# Altium PCB main_old.PcbDoc (part 11 of 15)
Units mil, origin at the board's own origin, x right, y up, seen from the top; angles counter-clockwise.
Board outline 8394.55 x 5164.44 mil, 7 copper layers (Top Layer 1, Layer 2, Layer 3, Unused, Layer 4_pow, Layer 5_gnd, Bottom 6+gnd), stack 46.112 mil thick; 363 components, 409 nets, 1750 pads, 991 vias.
Unrouted connection lines stored in the file: 1.
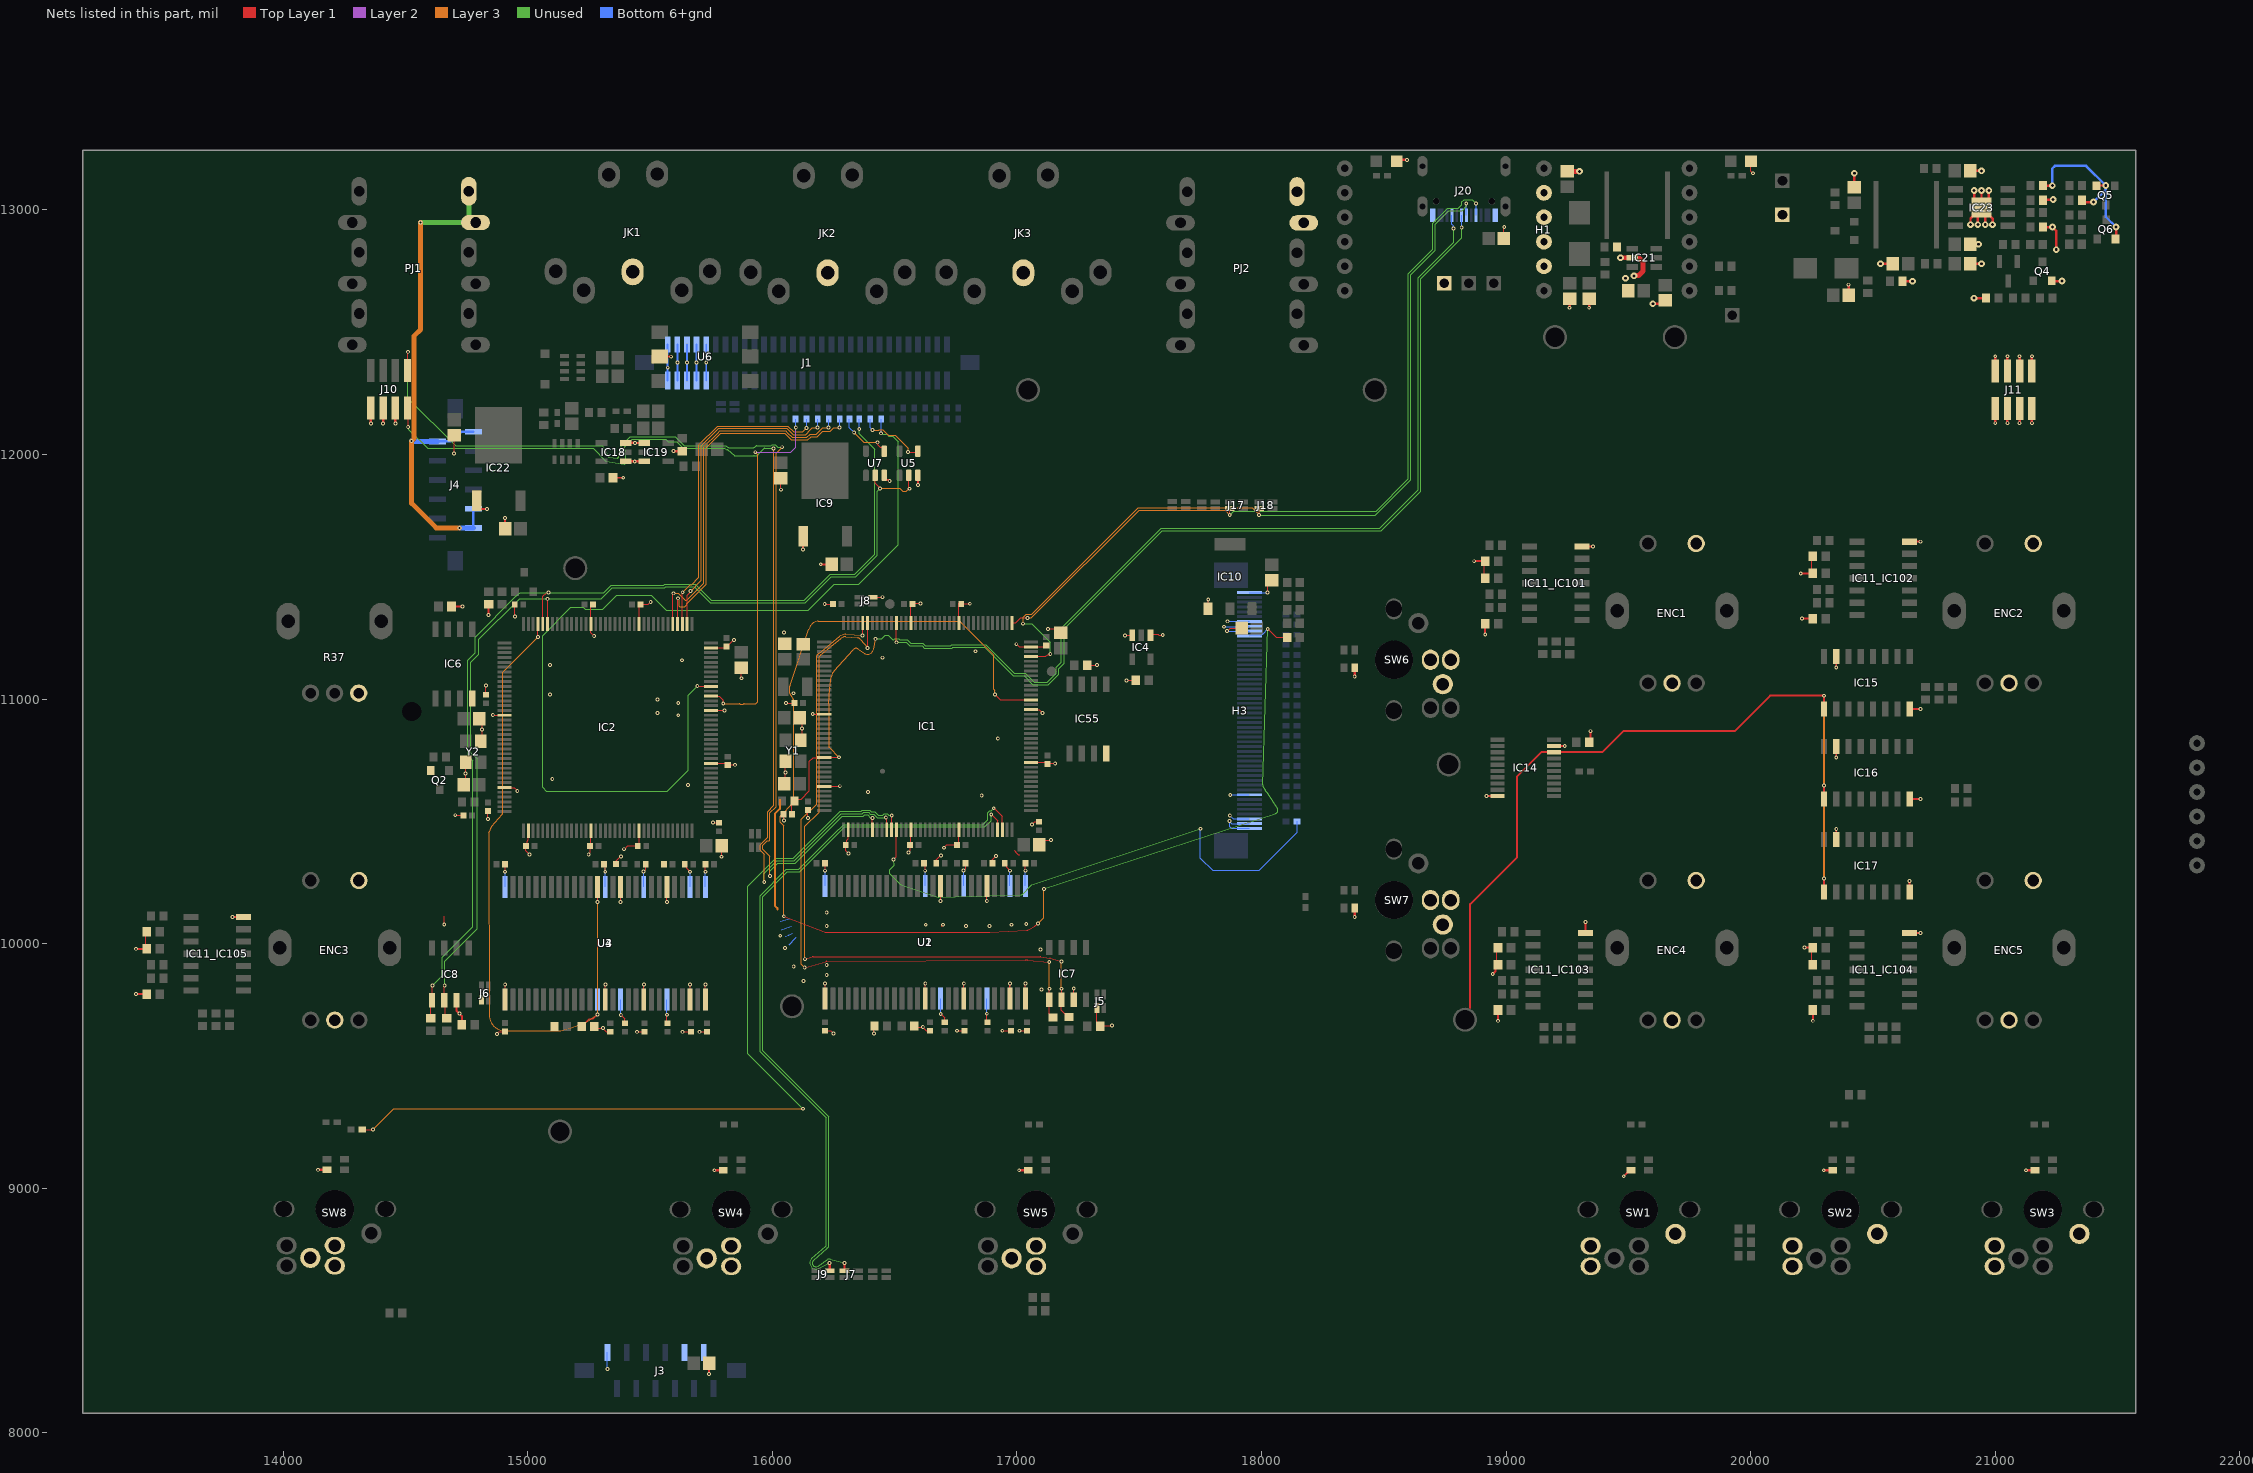
[diagram p14: the nets of this part, all layers, seen from the top]

## Via types
v1: diameter 15.75, hole 7.87, Top Layer 1 to Bottom 6+gnd, tented both sides, 923 vias
v2: diameter 27.56, hole 11.81, Top Layer 1 to Bottom 6+gnd, 45 vias
v3: diameter 23.62/23.62/23.62/23.62/23.62/23.62/23.62 (per signal layer), hole 12, Top Layer 1 to Bottom 6+gnd, tented top, 10 vias
v4: diameter 15.75, hole 7.87, Top Layer 1 to Bottom 6+gnd, 10 vias
v5: diameter 23.62/23.62/23.62/23.62/23.62/23.62/23.62 (per signal layer), hole 12, Top Layer 1 to Bottom 6+gnd, tented bottom, 3 vias

## Nets (pads, with @x,y where several pads share a name; then routed paths per layer and width w, separated by ;. In a path a pad name is that pad's centre, name@x,y a point inside that pad or via, vN(x,y) a via of type N, cw(c..) or ccw(c..) an arc to the next point about the centre after c; other vN are vias at no path point) (continued)
GND: C1.2 C2.2 C3.1 C4.1 C5.1 C6.1 C7.1 C8.1 C9.1 C10.1 C11.2 C12.2 C13.2 C14.2 C15.2 C16.2 C17.2 C18.2 C19.2 C20.2 C21.2 C22.2 C23.2 C24.2 C25.2 C26.2 C27.2 C28.2 C29.2 C30.2 C31.2 C32.2 C33.2 C34.2 C35.2 C36.2 C37.2 C38.2 C39.2 C40.2 C41.2 C42.2 C43.2 C44.2 C45.2 C46.2 C47.2 C48.2 C49.2 C50.2 C51.2 C52.2 C53.2 C54.2 C55.2 C56.2 C57.2 C58.2 C59.2 C60.2 C61.2 C63.1 C64.1 C65.1 C67.1 C68.1 C69.1 C70.1 C71.1 C72.1 C73.1 C74.1 C75.1 C76.1 C77_IC101.2 C77_IC102.2 C77_IC103.2 C77_IC104.2 C77_IC105.2 C78_IC101.2 C78_IC102.2 C78_IC103.2 C78_IC104.2 C78_IC105.2 C79_IC101.2 C79_IC102.2 C79_IC103.2 C79_IC104.2 C79_IC105.2 C80.2 C81.2 C85.1 C86.1 C87.1 C88.1 C89.1 C90.1 C91.1 C92.1 C93.1 C94.1 C95.1 C96.1 C97.1 D4.2 D5.2 ENC1.2 ENC1.C ENC2.2 ENC2.C ENC3.2 ENC3.C ENC4.2 ENC4.C ENC5.2 ENC5.C H1.2 H1.3 H1.4 H1.5 H3.1 H3.2 H3.3 H3.8 H3.42 H3.43 H3.44 H3.50 IC1.16 IC1.31 IC1.38 IC1.51 IC1.61 IC1.83 IC1.94 IC1.107 IC1.120 IC1.130 IC2.16 IC2.31 IC2.38 IC2.51 IC2.61 IC2.83 IC2.94 IC2.107 IC2.120 IC2.130 IC4.1 IC4.3 IC6.4 IC7.7 IC8.7 IC9.1 IC10.1 IC11_IC101.7 IC11_IC102.7 IC11_IC103.7 IC11_IC104.7 IC11_IC105.7 IC14.10 IC14.19 IC15.8 IC15.15 IC16.8 IC16.15 IC17.8 IC17.15 IC18.1 IC18.3 IC19.1 IC19.3 IC21.2 IC22.1 IC23.9 IC55.4 J1.51 J1.52 J1.53 J1.54 J1.55 J1.56 J1.57 J1.58 J1.59 J1.60 J3.1 J3.9 J3.11 J5.3 J6.3 J8.2 J10.4 J10.6 J10.8 J11.1 J11.2 J11.3 J11.4 J11.5 J11.6 J11.7 J11.8 J20.A1B12 J20.B1A12 JK1.2 JK2.2 JK3.2 PJ2.2 PJ2.22 Q2.2 Q4.2 Q5.2 Q6.2 R7.1 R9.1 R10.1 R12.1 R19.1 R20.1 R37.3 R51.1 R109.2 R126.2 R127.2 R128.1 R129.1 SW1.2 SW1.S1 SW2.2 SW2.S1 SW3.2 SW3.S1 SW4.2 SW4.S2 SW5.2 SW5.S2 SW6.2 SW6.S2 SW7.2 SW7.S2 SW8.2 SW8.S2 TP14.1 TP16.1 U1.6 U1.12 U1.28 U1.41 U1.46 U1.52 U1.54 U2.6 U2.12 U2.28 U2.41 U2.46 U2.52 U2.54 U3.6 U3.12 U3.28 U3.41 U3.46 U3.52 U3.54 U4.6 U4.12 U4.28 U4.41 U4.46 U4.52 U4.54 U5.3 U6.5 U7.3 Y1.2 Y1.4 Y2.2 Y2.4 | length 14393
  Top Layer 1 w5: C77_IC105.2@13437.01,9978.82 C79_IC105.2@13437.01,10048.82 ; v1(14658.33,10078.26) 14658.33,10111.48 ; v1(14698.37,12004.72) 14698.37,12076.56 C87.1@14700,12078.19 ; v1(14703.33,10525.26) 14736.48,10525.26 C8.1@14737.11,10524.63 ; C6.1@14745.26,10649.63 v1(14745.26,10695.47) Y2.2@14745.26,10741.32 ; Y2.4@14808.26,10827.94 14813.26,10832.94 14812.96,10833.23 v1(14812.96,10876.28) ; v1@14813.26,10876.28 C4.1@14813.26,10919.63 ; C23.2@14828.33,11017.58 v1(14828.33,11055.26) ; v1(14836.76,10509.97) C22.2@14836.76,10542.14 ; v1(14856.85,10934.67) 14857.26,10934.26 14903.59,10934.26 IC2.16@14904,10933.84 ; v1(14873.33,9631.26) 14882.06,9639.98 C47.2@14906.7,9639.98 ; U3.28@14899.75,9789.27 U3.28@14907.25,9781.77 ; IC2.31@14904,10638.57 14904.16,10638.41 14945.27,10638.41 14956.95,10626.73 v1(14956.95,10624.81) ; C60.2@14906.7,10324.63 14907.01,10324.32 v1(14907.01,10294.12) ; v1@14907.25,9833.24 U3.28@14907.25,9781.77 ; C24.2@14946.6,11386.87 14947.01,11386.47 v1(14947.01,11338.03) ; IC2.38@15001.96,10461.87 15001.96,10424.83 14996.76,10419.63 14996.76,10404.27 C29.2@14992.11,10399.63 14992.11,10379.48 v1(15006.33,10365.26) ; R12.1@15108.19,9658.48 R12.1@15109.34,9659.63 ; v1@15248.85,10367.54 15254.44,10373.13 C30.2@15254.44,10396.24 ; C30.2@15254.44,10399.63 15257.86,10403.05 IC2.51@15257.86,10461.87 ; C25.2@15265.89,11386.87 15257.86,11378.84 IC2.130@15257.86,11307.38 15257.86,11271.73 v1(15271.33,11258.26) ; R9.1@15271.7,9659.63 15276.7,9654.63 v1(15306.7,9654.63) 15321.35,9639.98 C48.2@15336.7,9639.98 ; C59.2@15311.7,10324.63 15316.45,10319.87 v1(15316.45,10294.12) ; U3.41@15316.7,9771.4 v1@15316.7,9833.24 ; C58.2@15362.05,10324.63 15362.05,10339.73 15379.34,10357.01 v1(15380.43,10357.01) ; v1@15379.69,10170.19 U3.12@15379.69,10232.03 ; v1(15380.09,9708.66) 15396.7,9692.06 C49.2@15396.7,9674.63 ; v1(15393.33,10386.26) 15395.33,10386.26 15408.7,10399.63 C31.2@15449.44,10399.63 15454.71,10404.9 IC2.61@15454.71,10461.87 ; v1(15446.7,9639.63) 15476.35,9639.63 C50.2@15476.7,9639.98 ; IC2.120@15454.71,11307.38 15454.71,11380.69 C26.2@15460.89,11386.87 15491.95,11386.87 v1(15502.33,11397.26) ; v1(15473.52,10294.63) 15481.7,10302.81 C57.2@15481.7,10324.63 ; U3.46@15474.18,9771.4 v1@15474.18,9833.24 ; v1(15568.42,9709.31) 15568.42,9677.9 C51.2@15571.7,9674.63 ; v1@15568.67,10170.19 U3.6@15568.67,10232.03 ; v1(15631.7,9639.63) 15666.35,9639.63 C52.2@15666.7,9639.98 ; C55.2@15641.7,10324.63 15649.56,10316.77 15649.56,10307.47 v1(15662.91,10294.12) ; U3.52@15663.16,9771.4 v1@15663.16,9833.24 ; v1(15701.7,9639.63) 15731.74,9639.63 C53.2@15732.09,9639.98 ; v1(15725.9,10294.12) 15725.9,10323.83 C54.2@15726.7,10324.63 ; U3.54@15726.15,9771.4 U3.54@15726.15,9771.46 v1@15726.15,9833.24 ; IC2.83@15749.52,10736.99 C32.2@15809.75,10736.99 ; IC2.94@15749.52,10953.53 15749.65,10953.39 15804.2,10953.39 v1(15804.33,10953.26) ; IC2.107@15749.52,11209.43 15806.56,11209.43 C27.2@15811.76,11214.63 15812.55,11214.63 15839.18,11241.26 15842.33,11241.26 v1(15843.33,11242.26) ; v1(15757.13,10494.98) C28.2@15781.4,10494.98 ; v1(15792.51,10355.38) C10.1@15792.51,10398.88 ; C32.2@15817.74,10730.01 15819.1,10731.37 v1(15846.69,10731.37) ; v1(15873.33,11085.26) C2.2@15873.33,11128.76 ; v1(16035,11856.18) C71.1@16035,11903.19 ; C7.1@16045.35,10528.82 16047.68,10526.5 16047.05,10525.86 v1(16047.05,10504.19) ; C5.1@16053.5,10653.82 v1(16053.5,10699.66) Y1.2@16053.5,10745.51 ; v1(16055,10983.82) C12.2@16090.35,10983.82 ; Y1.4@16116.5,10832.13 16121.5,10837.13 v1(16121.5,10880.47) C3.1@16121.5,10923.82 ; v1@16122.09,9847.2 v1(16127.09,9847.2) ; v1(16145.22,10513.6) 16145.22,10546.55 C13.2@16145.45,10546.77 ; v1(16165,10938.82) 16165.79,10938.03 IC1.16@16212.24,10938.03 ; U1.28@16208.05,9793.46 U1.28@16215.55,9785.96 ; IC1.31@16212.24,10642.76 16212.78,10643.29 16275.11,10643.29 v1(16275.64,10643.82) ; v1(16213.87,11388.21) 16214.48,11388.82 C11.2@16247.68,11388.82 ; C33.2@16215,9644.17 16215.35,9643.82 16238.61,9643.82 v1(16249.87,9632.56) ; C40.2@16215,10328.82 16215.31,10328.51 v1(16215.31,10298.31) ; v1@16215.55,9837.43 U1.28@16215.55,9785.96 ; IC1.38@16310.2,10466.06 16310.2,10429.01 16305,10423.82 16305,10408.46 C21.2@16300.35,10403.82 16300.35,10378.94 v1(16311.22,10368.07) ; J8.2@16410,11416.38 16449.35,11416.38 v1(16449.58,11416.61) ; v1@16415,9628.82 v1(16415,9632.56) 16415,9661.18 R10.1@16417.64,9663.82 ; v1(16557.09,10372.2) 16557.09,10375.11 16562.68,10380.7 C20.2@16562.68,10403.82 16566.1,10407.24 IC1.51@16566.1,10466.06 ; IC1.130@16566.1,11311.57 16566.1,11395.27 C14.2@16569.65,11398.82 ; C14.2@16572.32,11388.82 16575.61,11392.1 16605.25,11392.1 v1(16606.12,11391.23) ; R7.1@16580,9663.82 16585,9658.82 v1(16615,9658.82) 16629.65,9644.17 C34.2@16645,9644.17 ; C41.2@16620,10328.82 16624.75,10324.06 v1(16624.75,10298.31) ; U1.41@16625,9775.59 v1@16625,9837.43 ; C46.2@16670.35,10328.82 16670.35,10343.92 16687.64,10361.2 v1(16688.73,10361.2) ; v1@16687.99,10174.38 U1.12@16687.99,10236.22 ; v1(16688.39,9712.85) 16705,9696.25 C35.2@16705,9678.82 ; v1@16692.09,10072.2 v1(16697.09,10077.2) ; v1(16702.09,10392.2) 16713.7,10403.82 C19.2@16755.25,10403.82 ; v1(16755,9643.82) 16784.65,9643.82 C36.2@16785,9644.17 ; C19.2@16757.68,10403.82 16762.95,10409.09 IC1.61@16762.95,10466.06 ; IC1.120@16762.95,11311.57 16762.95,11392.13 C15.2@16769.65,11398.82 ; C15.2@16772.32,11388.82 16773.42,11389.92 v1(16807.14,11389.92) ; v1(16781.82,10298.82) 16790,10307 C42.2@16790,10328.82 ; U1.46@16782.48,9775.59 v1@16782.48,9837.43 ; v1(16876.72,9713.5) 16876.72,9682.09 C37.2@16880,9678.82 ; v1(16876.72,10174.13) U1.6@16876.72,10235.97 ; v1@16876.97,10174.38 U1.6@16876.97,10236.22 ; v1@16877.21,10174.62 U1.6@16877.21,10236.46 ; v1@16877.46,10174.38 U1.6@16877.46,10271.22 ; C43.2@16899.65,10328.82 16899.65,10343.46 v1(16915,10358.82) ; v1(16940,9643.82) 16974.65,9643.82 C38.2@16975,9644.17 ; C44.2@16950,10328.82 16957.86,10320.96 16957.86,10311.66 v1(16971.21,10298.31) ; U1.52@16971.21,9775.4 v1@16971.21,9837.68 ; U1.52@16971.46,9775.59 v1@16971.46,9837.43 ; U1.52@16971.7,9775.83 v1(16971.7,9837.68) ; U1.52@16971.95,9740.59 v1@16971.95,9837.43 ; 16988.09,10382.2 16995.41,10374.88 16995.41,10373.15 17004.36,10364.2 17011.09,10364.2 ; v1(16997.38,11224.53) 16998.52,11224.53 17008.82,11214.22 17057.16,11214.22 IC1.107@17057.76,11213.62 17114.8,11213.62 C16.2@17120,11218.82 ; v1(17010,9643.82) 17040.04,9643.82 C39.2@17040.39,9644.17 ; v1(17034.2,10298.31) 17034.2,10328.02 C45.2@17035,10328.82 ; U1.54@17034.45,9775.59 v1@17034.45,9837.43 ; IC1.83@17057.76,10741.18 17117.99,10741.18 C17.2@17125,10734.17 17127.6,10736.78 v1(17156.4,10736.78) 17156.83,10737.2 v1@17157.09,10737.2 ; IC1.94@17057.76,10957.72 17059.09,10956.38 17091.36,10956.38 v1@17104.37,10943.37 ; v1(17061.71,10487.58) 17072.94,10498.82 17089.65,10498.82 C18.2@17090,10498.46 ; C9.1@17091.5,10403.82 17111.44,10423.76 v1(17138.52,10423.76) ; v1(17126.31,11287.1) 17163.21,11287.1 C1.2@17180,11270.31 C1.2@17188.15,11262.16 ; IC7.7@17232.09,9770.43 v1(17232.09,9817.2) ; C63.1@17279.95,11138.84 v1(17326.66,11138.84) ; J5.3@17327.09,9737.09 17327.09,9680.2 17345.08,9662.2 17348.08,9665.2 v1(17389.09,9665.2) ; v1(17441.21,11260.34) 17441.81,11260.94 IC4.3@17470.98,11260.94 ; v1(17448.16,11076.73) C61.2@17480.39,11076.73 ; IC4.1@17545.79,11260.94 17549.23,11264.39 17578.14,11264.39 17580.64,11261.89 17595.64,11261.89 v1(17596.01,11261.52) ; IC10.1@17782.11,11360.08 v1(17782.11,11407.09) ; v1(17859.5,11277.91) 17871.16,11289.57 17900.31,11289.57 C76.1@17913.35,11302.6 ; v1(18024.8,11436.25) 18024.8,11469.09 C74.1@18041.42,11485.71 ; C77_IC101.2@18909.72,11493.82 C79_IC101.2@18909.72,11563.82 ; C77_IC103.2@18962.01,9913.82 C79_IC103.2@18962.01,9983.82 ; C88.1@18991.1,12883.31 18990.73,12883.68 18990.73,12928.69 v1(18992.61,12930.57) ; D4.2@20001.34,13200 20001.34,13158.66 v1(20010,13150) ; C77_IC104.2@20249.29,9913.82 C79_IC104.2@20249.29,9983.82 ; C77_IC102.2@20249.29,11513.82 C79_IC102.2@20249.29,11583.82 ; U3.28@14907.25,9781.77 14907.25,9771.4 U3.28@14907.25,9771.46 U3.28@14907.25,9781.77 ; U1.28@16215.55,9785.96 U1.28@16215.55,9775.59 U1.28@16215.55,9785.96
  Top Layer 1 w8: v1@13397.76,9793.82 C78_IC105.2@13441.93,9793.82 ; v1@13397.76,9978.82 C77_IC105.2@13441.93,9978.82 ; v1@13793.11,10108.82 IC11_IC105.7@13837.28,10108.82 ; C86.1@14688.07,11378.82 v1@14732.24,11378.82 ; IC8.7@14708.33,9768.49 14708.33,9725.48 v1(14720,9713.82) 14730,9703.82 C64.1@14730,9668.82 ; IC22.1@14790,11794.64 14790,11793.43 14806.16,11777.27 14832.36,11777.27 v1(14832.51,11777.42) ; v1@14840,11343.47 R109.2@14840,11387.64 ; C75.1@14907.01,11696.18 v1@14907.01,11740.35 ; C80.2@15348.15,11905 v1(15390,11905) ; U6.5@15539.96,12400 v1(15586.22,12400) ; v1@15741.5,8240.83 C85.1@15741.5,8285 ; v1@16125,11612.01 IC9.1@16125,11656.18 ; v1@16197.84,11551.18 C72.1@16242.01,11551.18 ; U7.3@16457.4,11915 16457.4,11903.77 16464.88,11896.3 16473.63,11896.3 16477.53,11892.4 v1(16479.63,11892.4) v1@16480,11892.03 ; v1(16594.8,11875.2) U5.3@16594.8,11915 ; v1(18869.65,11563.82) C79_IC101.2@18914.65,11563.82 ; v1(18914.65,11263.82) C78_IC101.2@18914.65,11308.82 ; v1(18920,10603.82) 18920.16,10603.66 IC14.10@18964.33,10603.66 ; v1(18945.5,9875.67) 18956.65,9886.82 18956.65,9903.54 C77_IC103.2@18966.93,9913.82 ; v1@18966.93,9684.65 C78_IC103.2@18966.93,9728.82 ; IC14.19@19195.67,10808.38 19195.89,10808.6 19239.78,10808.6 v1(19240,10808.82) ; IC11_IC101.7@19310,11623.82 v1(19355,11623.82) ; IC11_IC103.7@19325,10043.82 v1@19325,10087.99 ; C73.1@19345,10823.82 v1(19345,10868.82) ; v1@20205.12,11513.82 C77_IC102.2@20249.29,11513.82 ; v1@20210.04,11328.82 C78_IC102.2@20254.21,11328.82 ; v1@20220.83,9983.82 C79_IC104.2@20265,9983.82 ; v1@20254.21,9684.65 C78_IC104.2@20254.21,9728.82 ; IC17.15@20350,10423.82 v1@20350,10467.99 ; v1@20350,10761.93 IC16.15@20350,10806.1 ; v1@20350,11129.65 IC15.15@20350,11173.82 ; IC11_IC104.7@20649.57,10043.82 v1@20693.74,10043.82 ; IC11_IC102.7@20649.57,11643.82 v1@20693.74,11643.82 ; IC17.8@20650,10211.53 v1@20650,10255.71 ; IC16.8@20650,10591.53 v1@20694.17,10591.53 ; IC15.8@20650,10959.25 v1@20694.17,10959.25
  Top Layer 1 w10: v1(14141.66,9075.38) SW8.2@14178.54,9075.38 ; v1(14358.32,12126.42) J10.8@14358.32,12190.6 ; v1(14408.32,12126.42) J10.6@14408.32,12190.6 ; v1(14458.32,12126.42) J10.4@14458.32,12190.6 ; IC18.1@15399.63,11972.31 15400.27,11971.67 v1(15437.29,11971.67) 15437.93,11972.31 IC19.3@15476.2,11972.31 ; IC18.3@15399.63,12047.11 15399.84,12047.32 v1(15438.73,12047.32) 15438.93,12047.11 IC19.1@15476.2,12047.11 ; v1(15595.04,12014.29) 15595.17,12014.16 C81.2@15641.2,12014.16 ; v1(15762.42,9073.5) SW4.2@15799.29,9073.5 ; v1(17009.1,9073.5) SW5.2@17045.97,9073.5 ; v1(18380.96,10109.26) SW7.2@18380.96,10146.13 ; v1(18380.96,11091.85) SW6.2@18380.96,11128.72 ; D5.2@18552.68,13200 18557.68,13205 v1(18595,13205) ; v1(19259.81,12600.13) C89.1@19259.81,12637 ; v1(19339.81,12600.13) C91.1@19339.81,12637 ; v1(19481.11,9048.93) SW1.2@19507.18,9075 ; v2(19600.08,12616.31) 19600.88,12617.12 19637.12,12617.12 C69.1@19650,12630 ; v1(20298.76,9073.5) SW2.2@20335.64,9073.5 ; C92.1@20400.51,12650 C92.1@20400.86,12649.65 ; C92.1@20400.51,12650.98 v1(20400.51,12694.49) ; C97.1@20424.02,13092.99 v2(20424.02,13150) ; v2(20530.91,12780) C95.1@20581.02,12780 ; R19.1@20620.2,12710 R19.1@20621.47,12708.73 v2(20661.71,12708.73) ; C94.1@20897.01,12780 v2(20944.02,12780) ; C93.1@20897.01,12860 v2(20931.46,12860) ; C96.1@20897.01,13160 v2(20944.02,13160) ; v2(20899.02,12940) 20899.02,12965 IC23.9@20929.02,12995 ; v2(20913.39,12639.37) R51.1@20962.2,12639.37 ; v2(20914.02,13080) 20914.02,13040 IC23.9@20944.02,13010 ; v2(20929.02,12940) IC23.9@20929.02,12995 ; v2(20944.02,13080) IC23.9@20944.02,13010 ; v2(20959.02,12940) 20959.02,12980 20966.52,12987.5 20989.02,12965 v2(20989.02,12940) ; v2(20974.02,13080) 20974.02,13040 IC23.9@20944.02,13010 ; v1(21000,12128.13) J11.8@21000,12165 ; J11.7@21000,12365 v1(21000,12401.87) ; v1(21050,12128.13) J11.6@21050,12165 ; J11.5@21050,12365 v1(21050,12401.87) ; v1(21100,12128.13) J11.4@21100,12165 ; J11.3@21100,12365 v1(21100,12401.87) ; v1(21125.53,9073.5) SW3.2@21162.41,9073.5 ; v1(21150,12128.13) J11.2@21150,12165 ; J11.1@21150,12365 v1(21150,12401.87) ; R126.2@21195.2,12930 v2(21234.02,12930) 21249.58,12914.44 v2(21249.58,12837.57) ; R128.1@21195.2,13100 21195.88,13099.31 v2(21233.43,13099.31) ; R127.2@21198.09,13042.5 v2(21236.91,13042.5) ; Q4.2@21230.79,12710 21231.42,12709.37 v2(21273.39,12709.37) ; R129.1@21355.2,13040 21363.01,13032.19 v2(21401.83,13032.19) ; Q5.2@21416.61,13098.74 21417.87,13100 v2(21451.89,13100) ; Q6.2@21491.42,12881.26 21494.02,12883.86 v2(21494.02,12930) ; IC23.9@20929.02,12995 IC23.9@20944.02,13010
  Top Layer 1 w20: C70.1@19249.81,13157.99 v2(19299.81,13157.99) ; v2(19467.8,12804.4) 19543.5,12804.4 19560.01,12787.89 19560.01,12749.74 19542.4,12732.13 19524.79,12732.13 v2(19523.34,12730.68)
  Layer 3 w8: 16020,10138.82 16020,10145.75 16010.17,10155.58 16010.17,10530.7 16030.55,10551.08 16030.55,10588.82
  Bottom 6+gnd w5: U4.28@14907.25,10232.03 v1@14907.25,10293.87 ; v1(15316.45,10294.12) 15316.45,10308.38 15318.33,10310.26 ; U4.41@15316.7,10232.03 v1@15316.7,10293.87 ; v1(15325.53,8260.95) 15325.53,8276.49 15325.65,8276.61 J3.1@15325.65,8328.46 ; U4.12@15379.69,9771.4 15380.09,9771 v1(15380.09,9708.66) ; v1(15473.52,10294.63) 15473.52,10232.69 U4.46@15474.18,10232.03 ; v1@15568.67,9709.56 U4.6@15568.67,9771.4 ; U4.52@15663.16,10232.03 U4.52@15663.16,10232.09 v1@15663.16,10293.87 ; U4.54@15726.15,10232.03 U4.54@15726.15,10232.09 v1@15726.15,10293.87 ; 16031.42,10091.84 16069.12,10101.06 ; 16037.09,10057.2 16077.09,10072.2 ; 16052.48,10029.28 16067.54,10035.41 ccw(c16061.74,10049.65) 16068.27,10035.73 16082.09,10042.2 ; 16069.72,9996.4 16080.34,10007.41 cw(c16091.41,9996.73) 16080.53,10007.61 16081.11,10008.18 ; 16097.09,10027.2 16082.04,10009.19 ; U2.28@16215.55,10236.22 v1@16215.55,10298.06 ; U2.41@16625,10236.22 v1@16625,10298.06 ; U2.12@16687.99,9775.59 16688.39,9775.19 v1(16688.39,9712.85) ; v1(16781.82,10298.82) 16781.82,10236.88 U2.46@16782.48,10236.22 ; v1@16876.97,9713.75 U2.6@16876.97,9775.59 ; U2.52@16971.46,10236.22 v1@16971.46,10298.06 ; U2.54@17034.45,10236.22 v1@17034.45,10298.06 ; v1(17846.42,11295.71) 17847.48,11296.77 17948.94,11296.77 H3.43@17950,11297.83 ; v1@17859.27,11277.67 17859.74,11278.15 H3.42@17950,11278.15 ; v1(17861.12,11318.02) 17861.37,11317.77 17949.75,11317.77 H3.44@17950,11317.52 ; v1(17868.92,10501.81) 17868.92,10499.9 v1@17870,10498.82 ; v1(17870.37,10523.98) 17883.91,10510.43 H3.3@17950,10510.43 H3.3@17950.78,10511.21 ; v1(17872.11,10608.09) 17872.5,10608.47 17949.62,10608.47 H3.8@17950,10608.86 ; H3.1@17950,10471.06 17877.75,10471.06 17870,10478.82 v1@17870,10498.82 ; H3.50@17950,11435.63 v1@18024.18,11435.63 ; H3.2@17950.62,10491.37 H3.2@17950,10490.75 17878.07,10490.75 v1@17870,10498.82 ; 16081.11,10008.18 ccw(c16070.24,10019.05) 16082.04,10009.19 ; 16081.11,10008.18 ccw(c16070.24,10019.05) 16082.04,10009.19 ; 16081.11,10008.18 ccw(c16070.24,10019.05) 16082.04,10009.19 ; 16081.11,10008.18 ccw(c16070.24,10019.05) 16082.04,10009.19 ; 16081.11,10008.18 ccw(c16070.24,10019.05) 16082.04,10009.19 ; 16081.11,10008.18 ccw(c16070.24,10019.05) 16082.04,10009.19 ; 16081.11,10008.18 ccw(c16070.24,10019.05) 16082.04,10009.19 ; 16081.11,10008.18 ccw(c16070.24,10019.05) 16082.04,10009.19 ; 16081.11,10008.18 ccw(c16070.24,10019.05) 16082.04,10009.19 ; 16081.11,10008.18 ccw(c16070.24,10019.05) 16082.04,10009.19 ; 16081.11,10008.18 ccw(c16070.24,10019.05) 16082.04,10009.19 ; 16081.11,10008.18 ccw(c16070.24,10019.05) 16082.04,10009.19 ; 16081.11,10008.18 ccw(c16070.24,10019.05) 16082.04,10009.19 ; 16081.11,10008.18 ccw(c16070.24,10019.05) 16082.04,10009.19 ; 16081.11,10008.18 ccw(c16070.24,10019.05) 16082.04,10009.19 ; 16081.11,10008.18 ccw(c16070.24,10019.05) 16082.04,10009.19
  Bottom 6+gnd w8: J1.59@15571.97,12302.36 v1(15571.97,12355) 15571.97,12390.39 15569.35,12393.01 15569.35,12406.99 15571.97,12409.61 J1.60@15571.97,12450 ; J1.57@15611.34,12302.36 v1(15611.34,12376.18) J1.58@15611.34,12450 ; J1.55@15650.71,12302.36 v1(15650.71,12376.18) J1.56@15650.71,12450 ; J1.53@15690.08,12302.36 v1(15690.08,12376.18) J1.54@15690.08,12450 ; J1.51@15729.45,12302.36 v1(15729.45,12376.18) J1.52@15729.45,12450
  Bottom 6+gnd w10: v2(21233.43,13099.31) 21233.43,13169.42 21244.02,13180 21371.89,13180 v2(21451.89,13100) ; v2(21401.83,13032.19) 21450.86,13081.22 21450.86,13098.97 v2(21451.89,13100) ; v2(21494.02,12930) 21451.89,12972.13 v2(21451.89,13100)
  other v1: 15741.34,8240.67 18966.77,9684.49 20254.06,9684.49 13397.6,9793.98 17100.37,9812.2 14907.5,9833.49 15316.94,9833.49 15474.42,9833.49 15663.4,9833.49 15726.39,9833.49 16215.8,9837.68 16625.24,9837.68 16782.72,9837.68 17034.69,9837.68 16222.09,9872.2 16087.09,9907.2 16222.09,9912.2 17096.67,9976.53 13397.6,9978.98 16052.09,9982.2 20220.67,9983.98 16032.09,10032.2 20693.9,10043.66 16222.09,10072.2 16792.09,10072.2 16887.09,10072.2 16627.09,10077.2 16977.09,10077.2 17038.01,10080.26 19325.16,10088.15 13792.95,10108.98 16222.09,10127.2 15379.45,10169.94 15568.42,10169.94 16687.75,10174.13 20650.16,10255.86 15248.85,10364.63 20350.16,10468.15 20694.33,10591.38 16855.84,10605.43 16391.31,10620.38 15655,10648.82 15100,10673.82 20349.84,10761.77 16921.66,10838.82 15615,10933.82 17104.37,10943.24 15530,10943.82 20694.33,10959.09 15615,10983.82 15530,10998.82 15090,11018.82 16086.71,11023.77 20349.84,11129.49 15090,11138.82 15630,11158.82 16449.56,11169.26 16830,11195.74 16047.09,11272.2 20209.88,11328.98 14839.84,11343.31 14732.4,11378.66 20204.96,11513.98 16197.68,11551.34 16124.84,11611.85 20693.9,11643.66 14907.17,11740.51
  other v2: 19488.62,12720.72
GND_A: J4.2 J4.4 J4.11 J4.12 PJ1.2 PJ1.22 | length 2139.1
  Unused w20: v1(14561.41,12948.59) PJ1.22@14786.24,12948.59 ; PJ1.22@14758.68,12968.45 PJ1.2@14758.68,13076.5
  Layer 3 w20: v1(14561.41,12948.59) 14561.41,12511.41 14535,12485 14535,12065 v1(14525,12055) 14525,11800 14625,11700 v1(14720,11700)
  Bottom 6+gnd w10: J4.11@14630,12053.7 14688.7,12053.7 14728.07,12093.07 J4.12@14777.64,12093.07 ; J4.2@14777.64,11699.37 J4.4@14777.64,11778.11
  Bottom 6+gnd w20: v1(14525,12055) 14526.3,12053.7 J4.11@14630,12053.7 ; v1(14720,11700) 14777.01,11700 J4.2@14777.64,11699.37
GPIO_GUI.LED1_1: IC1.43 J10.1 | length 4374.9
  Top Layer 1 w5: J10.1@14508.32,12344.14 14510,12345.82 v1(14510,12420) ; IC1.43@16408.62,10466.06 v1(16408.64,10513.73)
  Unused w5: v1(14510,12420) 14510,12230 14705,12035 15305,12035 15328.77,11992.22 ; 15328.78,11992.19 ccw(c15333.14,11994.65) 15332.5,11989.69 15365.55,11985.56 ; 15365.58,11985.55 ccw(c15366.17,11990.52) 15371.04,11989.36 15381.58,12033.62 15381.91,12035 15382.91,12036 15419.6,12072.69 15602.41,12072.69 15640.1,12035 15809.63,12035 15816.54,12030.72 cw(c15813.89,12026.48) 15817.05,12030.35 ccw(c15825,12040) 15825,12027.5 15920.28,12027.5 ccw(c15920.28,12040) 15929.14,12031.19 15931.51,12033.55 cw(c15935.03,12030) 15935.03,12035 15993.26,12035 15998.63,12040.37 16011.37,12040.37 16021.74,12030 v1(16040,12030) ; v1(15989.9,10275.98) 15989.9,10297.04 16021.86,10329 16093.87,10329 16285.82,10520.94 16371.31,10520.94 16376.68,10526.31 16389.42,10526.31 16399.94,10515.79 16406.59,10515.79 v1(16408.64,10513.73)
  Layer 3 w5: v1(15989.9,10275.98) 15989.9,10356.61 15960.69,10385.82 15960.69,10401.55 15979.14,10420 15987.07,10420 15990,10422.93 15990,10535.04 16015,10560.04 16015,12005 v1(16040,12030)
GPIO_GUI.LED2_1: IC1.46 J10.2 | length 4258.9
  Top Layer 1 w5: J10.2@14508.32,12190.6 14510.75,12188.17 v1(14510.75,12112.06) ; v1(16463.77,10515.28) 16463.77,10514.31 16467.68,10510.4 IC1.46@16467.68,10466.06
  Unused w5: v1(14510.75,12112.06) 14512.72,12110.09 14512.72,12102.28 14590,12025 15267.74,12025 15317.75,11973.51 ccw(c15321.33,11977) 15320.56,11972.06 15393.75,11960.95 ; 15393.78,11960.94 ccw(c15394.5,11965.89) 15399.48,11966.3 15394.28,12029.66 15427.31,12062.69 15563.21,12062.69 15573.21,12052.69 15608.27,12052.69 15635.96,12025 15805.36,12025 ; 15805.39,12025 cw(c15805.33,12020) 15808.06,12024.19 15812.71,12021.16 ccw(c15825,12040) 15815.47,12019.62 15815.98,12019.38 cw(c15813.87,12014.85) 15817.05,12018.71 ; 15817.09,12018.67 15843.6,11996.19 ; 15843.62,11996.17 ccw(c15846.83,12000) 15846.83,11995 15924.56,11995 cw(c15924.53,11990) 15925.85,11994.82 ccw(c15930,12009.63) 15941.87,11999.85 cw(c15945.7,11996.64) 15942.14,12000.15 15965.54,12023.55 cw(c15969.06,12020) 15969.06,12025 v1(16005,12025) ; v1(15966.82,10252.68) 15965.49,10254.02 15965.49,10286.77 16017.72,10339 16089.73,10339 16281.67,10530.94 16367.16,10530.94 16372.54,10536.31 16393.56,10536.31 16400.66,10529.21 16414.9,10529.21 16428.84,10515.28 v1(16463.77,10515.28)
  Layer 3 w5: v1(15966.82,10252.68) 15966.82,10365.55 15950.69,10381.68 15950.69,10389.31 15950,10390 15950,10405 15980,10435 15980,10540 16005,10565 v1(16005,12025)
GPIO_GUI.LED3_1: IC1.47 R3.2 | length 3630.3
  Top Layer 1 w5: R3.2@14322.64,9240 14366.77,9240 v1(14367.35,9240.58) ; IC1.47@16487.36,10466.06 16487.36,10523.36 v1(16488,10524)
  Unused w5: v1(16125,9325) 15900,9550 15900,10235.43 16013.57,10349 16085.59,10349 16277.53,10540.94 16363.02,10540.94 16368.4,10546.31 16397.7,10546.31 16404.8,10539.21 16419.04,10539.21 16432.98,10525.28 16452.03,10525.28 16457.41,10530.65 16470.14,10530.65 16476.53,10524.27 16487.73,10524.27 v1(16488,10524)
  Layer 3 w5: v1(14367.35,9240.58) 14452.35,9325.58 16124.42,9325.58 v1(16125,9325)
GUI_NRST: C7.2 IC1.25 J20.A5 R5.2 | length 5372.7
  Top Layer 1 w5: C7.2@16080,10528.82 16080,10573.23 R5.2@16090.59,10583.82 16096.92,10590.15 16117.06,10590.15 16151.63,10624.73 16151.63,10745.45 16167.05,10760.87 IC1.25@16212.24,10760.87 16212.91,10761.53 16271.42,10761.53 v1(16272.09,10762.2)
  Unused w5: v1(16421.86,11246.58) 16446.18,11246.58 16461.05,11261.44 16473.79,11261.44 16491.71,11243.52 16496.66,11243.52 16500.72,11247.58 16515.67,11247.58 16521.03,11242.22 16551.6,11242.22 16565,11228.82 16615.44,11228.82 16625.91,11218.34 16729.52,11218.34 16733.76,11222.58 16872.45,11222.58 16988.83,11106.2 17033.83,11106.2 17071.04,11069 17124.11,11069 17160.78,11105.66 17160.78,11130.45 17181.69,11151.37 17181.69,11289.98 17590.7,11698.99 18483.13,11698.99 18640.37,11856.23 18640.37,12723.51 18785.16,12868.3 v1(18785.16,12923.92)
  Layer 3 w5: v1(16272.09,10762.2) 16232.14,10802.15 ; v1(16421.86,11246.58) 16413.87,11204.34 cw(c16388.94,11209.06) 16374.59,11188.13 16350.85,11204.46 ; 16230.7,10805.66 ccw(c16235.7,10805.66) 16232.14,10802.15 ; 16230.7,10805.66 ccw(c16235.7,10805.66) 16232.14,10802.15 ; 16230.7,10805.66 ccw(c16235.7,10805.66) 16232.14,10802.15 ; 16230.7,10805.66 ccw(c16235.7,10805.66) 16232.14,10802.15 ; 16230.7,10805.66 ccw(c16235.7,10805.66) 16232.14,10802.15 ; 16230.7,10805.66 ccw(c16235.7,10805.66) 16232.14,10802.15 ; 16230.7,10805.66 ccw(c16235.7,10805.66) 16232.14,10802.15 ; 16230.7,10805.66 ccw(c16235.7,10805.66) 16232.14,10802.15 ; 16230.7,10805.66 ccw(c16235.7,10805.66) 16232.14,10802.15 ; 16230.7,10805.66 ccw(c16235.7,10805.66) 16232.14,10802.15 ; 16230.7,10805.66 ccw(c16235.7,10805.66) 16232.14,10802.15 ; 16230.7,10805.66 ccw(c16235.7,10805.66) 16232.14,10802.15 ; 16230.7,10805.66 ccw(c16235.7,10805.66) 16232.14,10802.15 ; 16230.7,10805.66 ccw(c16235.7,10805.66) 16232.14,10802.15 ; 16230.7,10805.66 ccw(c16235.7,10805.66) 16232.14,10802.15 ; 16230.7,10805.66 ccw(c16235.7,10805.66) 16232.14,10802.15 ; 16230.7,10805.66 16230.68,10978.64 cw(c16276.06,10978.64) 16230.79,10981.78 16234.95,11041.91 ; 16234.95,11041.91 cw(c16290.2,11038.08) 16235.24,11044.84 ; 16234.95,11041.91 cw(c16290.2,11038.08) 16235.24,11044.84 ; 16234.95,11041.91 cw(c16290.2,11038.08) 16235.24,11044.84 ; 16234.95,11041.91 cw(c16290.2,11038.08) 16235.24,11044.84 ; 16234.95,11041.91 cw(c16290.2,11038.08) 16235.24,11044.84 ; 16234.95,11041.91 cw(c16290.2,11038.08) 16235.24,11044.84 ; 16234.95,11041.91 cw(c16290.2,11038.08) 16235.24,11044.84 ; 16234.95,11041.91 cw(c16290.2,11038.08) 16235.24,11044.84 ; 16234.95,11041.91 cw(c16290.2,11038.08) 16235.24,11044.84 ; 16234.95,11041.91 cw(c16290.2,11038.08) 16235.24,11044.84 ; 16234.95,11041.91 cw(c16290.2,11038.08) 16235.24,11044.84 ; 16234.95,11041.91 cw(c16290.2,11038.08) 16235.24,11044.84 ; 16234.95,11041.91 cw(c16290.2,11038.08) 16235.24,11044.84 ; 16234.95,11041.91 cw(c16290.2,11038.08) 16235.24,11044.84 ; 16234.95,11041.91 cw(c16290.2,11038.08) 16235.24,11044.84 ; 16234.95,11041.91 cw(c16290.2,11038.08) 16235.24,11044.84 ; 16235.24,11044.84 16240.98,11091.28 cw(c16286.01,11085.73) 16252.47,11116.29 16330.72,11202.18 ; 16330.72,11202.18 cw(c16342.09,11191.83) 16350.85,11204.46 ; 16330.72,11202.18 cw(c16342.09,11191.83) 16350.85,11204.46 ; 16330.72,11202.18 cw(c16342.09,11191.83) 16350.85,11204.46 ; 16330.72,11202.18 cw(c16342.09,11191.83) 16350.85,11204.46 ; 16330.72,11202.18 cw(c16342.09,11191.83) 16350.85,11204.46 ; 16330.72,11202.18 cw(c16342.09,11191.83) 16350.85,11204.46 ; 16330.72,11202.18 cw(c16342.09,11191.83) 16350.85,11204.46 ; 16330.72,11202.18 cw(c16342.09,11191.83) 16350.85,11204.46 ; 16330.72,11202.18 cw(c16342.09,11191.83) 16350.85,11204.46 ; 16330.72,11202.18 cw(c16342.09,11191.83) 16350.85,11204.46 ; 16330.72,11202.18 cw(c16342.09,11191.83) 16350.85,11204.46 ; 16330.72,11202.18 cw(c16342.09,11191.83) 16350.85,11204.46 ; 16330.72,11202.18 cw(c16342.09,11191.83) 16350.85,11204.46 ; 16330.72,11202.18 cw(c16342.09,11191.83) 16350.85,11204.46 ; 16330.72,11202.18 cw(c16342.09,11191.83) 16350.85,11204.46 ; 16330.72,11202.18 cw(c16342.09,11191.83) 16350.85,11204.46
  Bottom 6+gnd w5: J20.A5@18778.6,12978.4 18778.6,12941.8 18783.11,12937.29 18783.11,12925.98 v1(18785.16,12923.92)
GUI_SWD.CLK_1: IC1.109 J17.1 J20.A8 | length 3270.8
  Top Layer 1 w5: IC1.109@16979.49,11311.57 16980.12,11312.2 16995.7,11312.2 17015.41,11331.91 v1(17043.65,11331.91) ; v1@17870,11752.72 J17.1@17870,11778.82
  Unused w5: v1(17870.12,11752.6) 17886.42,11768.9 18468.12,11768.9 18600.37,11901.14 18600.37,12740.08 18699.39,12839.1 18699.39,12944.74 18761.98,13007.33 18805.26,13007.33 18819.18,13021.25 18819.18,13033.26 18828.05,13042.13 18861.22,13042.13 v1(18876.59,13026.75)
  Layer 3 w5: v1(17043.65,11331.91) 17059.36,11331.91 17499.47,11772.02 17850.69,11772.02 v1(17870.12,11752.6)
  Bottom 6+gnd w5: J20.A8@18877.02,12978.4 v1@18877.02,13026.32
GUI_SWD.IO_1: IC1.105 J18.1 J20.A7 | length 3473.8
  Top Layer 1 w5: IC1.105@17057.76,11174.25 17057.87,11174.37 17118.45,11174.37 17126.16,11182.08 17134.35,11182.08 v1(17136.4,11184.13) ; v1@17990,11752.72 J18.1@17990,11778.82
  Unused w5: v1(17025.37,11308.31) 17060.98,11308.31 17136.4,11232.89 v1(17136.4,11184.13) ; v1(17990.12,11752.6) 18465.97,11752.6 18610.37,11897 18610.37,12735.94 18709.39,12834.96 18709.39,12940.6 18766.12,12997.33 18820.63,12997.33 18837.76,13014.47 18837.76,13026.21 v1(18837.22,13026.75)
  Layer 3 w5: v1(17025.37,11308.31) 17025.29,11308.39 17025.29,11335.29 17037.28,11347.28 17060.59,11347.28 17495.33,11782.02 17961.98,11782.02 17990.12,11753.89 v1(17990.12,11752.6)
  Bottom 6+gnd w5: J20.A7@18837.65,12978.4 v1@18837.65,13026.32
GUI_SWD.SWO_1: IC1.133 J20.A6 | length 3918.2
  Top Layer 1 w5: v1(16507.09,11232.2) IC1.133@16507.07,11311.55
  Unused w5: v1(16507.09,11232.2) 16547.47,11232.2 16562.16,11217.52 16612.59,11217.52 16621.77,11208.34 16734.52,11208.34 16737.3,11211.12 16867.7,11211.12 16984.08,11094.74 17029.08,11094.74 17064.82,11059 17128.25,11059 17170.78,11101.52 17170.78,11124.24 17193.16,11146.62 17193.16,11287.3 17594.84,11688.99 18489.34,11688.99 18650.37,11850.01 18650.37,12719.37 18818.4,12887.4 v1(18818.4,12928.05)
  Bottom 6+gnd w5: J20.A6@18817.97,12978.4 18818.18,12978.19 18818.18,12928.27 v1(18818.4,12928.05)
I2C1_SCL: IC2.139 IC8.6 R15.1 U5.2 U7.2 | length 4086.1
  Top Layer 1 w5: v1(14660,9828.82) 14658.33,9827.15 IC8.6@14658.33,9768.49 14662.09,9764.73 14662.09,9701.51 R15.1@14668.33,9695.26 ; IC2.139@15080.7,11307.38 v1(15080.7,11410.07) ; U7.2@16420,11915 16420,11881.64 v1(16440,11861.64) ; U5.2@16557.4,11915 16557.4,11865.51 16560,11862.91 v1(16560,11860)
  Unused w5: v1(14660,9828.82) 14660,9928.82 14792.68,10061.5 14792.68,10756.14 14767.5,10781.32 14767.5,11151.32 14800,11183.82 14800,11243.82 14966.25,11410.07 v1(15080.7,11410.07) 15300.07,11410.07 15345.86,11455.86 15560.01,11455.86 15563.78,11459.64 15680.36,11459.64 15746.18,11393.82 16134.68,11393.82 16240.86,11500 16340.86,11500 16428.36,11587.5 16428.36,11850 v1(16440,11861.64)
  Layer 3 w5: v1(16440,11861.64) 16521.62,11861.64 16533.63,11849.63 16546.37,11849.63 16556.74,11860 v1(16560,11860)
I2C1_SCL1_9: R149.1 U5.4 | length 284.3
  Top Layer 1 w5: v1(16555,12010) 16590.98,12010 U5.4@16594.8,12013.82
  Layer 3 w5: v1(16410,12100) 16435.58,12100 16437.76,12102.17 16450.49,12102.17 16461.71,12090.96 16461.71,12090.41 16472.92,12079.19 16502.27,12079.19 16555,12026.46 v1(16555,12010)
  Bottom 6+gnd w5: R149.1@16400,12144.72 16400,12110 v1(16410,12100)
I2C1_SCL2_9: R151.1 U7.4 | length 227.9
  Top Layer 1 w5: v1(16430,12050) 16431.48,12048.52 16431.48,12039.74 16441.22,12030 16448.54,12030 16457.4,12021.14 U7.4@16457.4,12013.82
  Layer 3 w5: v1(16334.4,12089.55) 16373.95,12050 v1(16430,12050)
  Bottom 6+gnd w5: R151.1@16315,12144.72 16315,12110 16334.4,12090.6 v1(16334.4,12089.55) v1@16335,12088.95
I2C1_SCL_6: IC1.139 IC7.6 R13.1 | length 3306
  Top Layer 1 w5: v1(16133.17,9936.49) 16163.94,9946.7 ; v1(16388.94,11209.05) IC1.139@16388.94,11311.57 ; v1(17182.09,9927.2) 17135.92,9939.52 ; v1(17182.13,9815.69) 17182.13,9770.48 IC7.6@17182.09,9770.43 17182.09,9727.64 17210.12,9699.61 R13.1@17212.09,9699.61 ; 16163.94,9946.7 cw(c16167.09,9937.2) 16167.09,9947.2 ; 16163.94,9946.7 cw(c16167.09,9937.2) 16167.09,9947.2 ; 16163.94,9946.7 cw(c16167.09,9937.2) 16167.09,9947.2 ; 16163.94,9946.7 cw(c16167.09,9937.2) 16167.09,9947.2 ; 16163.94,9946.7 cw(c16167.09,9937.2) 16167.09,9947.2 ; 16163.94,9946.7 cw(c16167.09,9937.2) 16167.09,9947.2 ; 16163.94,9946.7 cw(c16167.09,9937.2) 16167.09,9947.2 ; 16163.94,9946.7 cw(c16167.09,9937.2) 16167.09,9947.2 ; 16163.94,9946.7 cw(c16167.09,9937.2) 16167.09,9947.2 ; 16163.94,9946.7 cw(c16167.09,9937.2) 16167.09,9947.2 ; 16163.94,9946.7 cw(c16167.09,9937.2) 16167.09,9947.2 ; 16163.94,9946.7 cw(c16167.09,9937.2) 16167.09,9947.2 ; 16163.94,9946.7 cw(c16167.09,9937.2) 16167.09,9947.2 ; 16163.94,9946.7 cw(c16167.09,9937.2) 16167.09,9947.2 ; 16163.94,9946.7 cw(c16167.09,9937.2) 16167.09,9947.2 ; 16163.94,9946.7 cw(c16167.09,9937.2) 16167.09,9947.2 ; 16167.09,9947.2 17094.81,9947.2 ; 17094.81,9947.2 cw(c17094.81,9937.2) 17096.68,9947.03 ; 17094.81,9947.2 cw(c17094.81,9937.2) 17096.68,9947.03 ; 17094.81,9947.2 cw(c17094.81,9937.2) 17096.68,9947.03 ; 17094.81,9947.2 cw(c17094.81,9937.2) 17096.68,9947.03 ; 17094.81,9947.2 cw(c17094.81,9937.2) 17096.68,9947.03 ; 17094.81,9947.2 cw(c17094.81,9937.2) 17096.68,9947.03 ; 17094.81,9947.2 cw(c17094.81,9937.2) 17096.68,9947.03 ; 17094.81,9947.2 cw(c17094.81,9937.2) 17096.68,9947.03 ; 17094.81,9947.2 cw(c17094.81,9937.2) 17096.68,9947.03 ; 17094.81,9947.2 cw(c17094.81,9937.2) 17096.68,9947.03 ; 17094.81,9947.2 cw(c17094.81,9937.2) 17096.68,9947.03 ; 17094.81,9947.2 cw(c17094.81,9937.2) 17096.68,9947.03 ; 17094.81,9947.2 cw(c17094.81,9937.2) 17096.68,9947.03 ; 17094.81,9947.2 cw(c17094.81,9937.2) 17096.68,9947.03 ; 17094.81,9947.2 cw(c17094.81,9937.2) 17096.68,9947.03 ; 17094.81,9947.2 cw(c17094.81,9937.2) 17096.68,9947.03 ; 17096.68,9947.03 17134.83,9939.77 ; 17134.83,9939.77 cw(c17131.96,9924.67) 17135.92,9939.52 ; 17134.83,9939.77 cw(c17131.96,9924.67) 17135.92,9939.52 ; 17134.83,9939.77 cw(c17131.96,9924.67) 17135.92,9939.52 ; 17134.83,9939.77 cw(c17131.96,9924.67) 17135.92,9939.52 ; 17134.83,9939.77 cw(c17131.96,9924.67) 17135.92,9939.52 ; 17134.83,9939.77 cw(c17131.96,9924.67) 17135.92,9939.52 ; 17134.83,9939.77 cw(c17131.96,9924.67) 17135.92,9939.52 ; 17134.83,9939.77 cw(c17131.96,9924.67) 17135.92,9939.52 ; 17134.83,9939.77 cw(c17131.96,9924.67) 17135.92,9939.52 ; 17134.83,9939.77 cw(c17131.96,9924.67) 17135.92,9939.52 ; 17134.83,9939.77 cw(c17131.96,9924.67) 17135.92,9939.52 ; 17134.83,9939.77 cw(c17131.96,9924.67) 17135.92,9939.52 ; 17134.83,9939.77 cw(c17131.96,9924.67) 17135.92,9939.52 ; 17134.83,9939.77 cw(c17131.96,9924.67) 17135.92,9939.52 ; 17134.83,9939.77 cw(c17131.96,9924.67) 17135.92,9939.52 ; 17134.83,9939.77 cw(c17131.96,9924.67) 17135.92,9939.52
  Layer 3 w5: v1(16133.17,9936.49) 16133.17,10479.8 16190.68,10537.31 16190.68,11170.85 ; v1(16388.94,11209.05) 16359.1,11244.93 ccw(c16347.28,11235.1) 16348.61,11250.41 16300.44,11254.6 ; v1(17182.13,9815.69) v1(17182.09,9927.2) ; 16190.68,11170.85 cw(c16195.68,11170.85) 16192.12,11174.36 ; 16190.68,11170.85 cw(c16195.68,11170.85) 16192.12,11174.36 ; 16190.68,11170.85 cw(c16195.68,11170.85) 16192.12,11174.36 ; 16190.68,11170.85 cw(c16195.68,11170.85) 16192.12,11174.36 ; 16190.68,11170.85 cw(c16195.68,11170.85) 16192.13,11174.37 16195.11,11177.35 cw(c16205.68,11166.71) 16196.18,11178.32 16282.13,11248.93 ; 16282.13,11248.93 cw(c16298.24,11229.33) 16300.44,11254.61 ; 16282.13,11248.93 cw(c16298.24,11229.33) 16300.44,11254.61 ; 16282.13,11248.93 cw(c16298.24,11229.33) 16300.44,11254.61 ; 16282.13,11248.93 cw(c16298.24,11229.33) 16300.44,11254.61 ; 16282.13,11248.93 cw(c16298.24,11229.33) 16300.44,11254.61 ; 16282.13,11248.93 cw(c16298.24,11229.33) 16300.44,11254.61 ; 16282.13,11248.93 cw(c16298.24,11229.33) 16300.44,11254.61 ; 16282.13,11248.93 cw(c16298.24,11229.33) 16300.44,11254.61 ; 16282.13,11248.93 cw(c16298.24,11229.33) 16300.44,11254.61 ; 16282.13,11248.93 cw(c16298.24,11229.33) 16300.44,11254.61 ; 16282.13,11248.93 cw(c16298.24,11229.33) 16300.44,11254.61 ; 16282.13,11248.93 cw(c16298.24,11229.33) 16300.44,11254.61 ; 16282.13,11248.93 cw(c16298.24,11229.33) 16300.44,11254.61 ; 16282.13,11248.93 cw(c16298.24,11229.33) 16300.44,11254.61 ; 16282.13,11248.93 cw(c16298.24,11229.33) 16300.44,11254.61 ; 16282.13,11248.93 cw(c16298.24,11229.33) 16300.44,11254.61
I2C1_SDA: IC2.140 IC8.5 R16.1 R150.1 | length 4200.7
  Top Layer 1 w5: R16.1@14603.33,9695.26 14603.33,9763.49 IC8.5@14608.33,9768.49 14608.33,9827.15 v1(14610,9828.82) ; IC2.140@15061.01,11307.38 15061.01,11419.83 15076.61,11435.43 v1(15085.14,11435.43)
  Unused w5: v1(14610,9828.82) 14650,9868.82 14650,9943.82 14775,10068.82 14775,10748.82 14755,10768.82 14755,11158.82 14785,11188.82 14785,11217.08 14785.37,11217.45 14785.37,11230.19 14785,11230.56 14785,11253.82 14953.54,11422.35 cw(c14957.05,11418.8) 14954.1,11422.83 14961.36,11428.15 14968.64,11435.43 v1(15085.14,11435.43) 15311.29,11435.43 15341.72,11465.86 15555.86,11465.86 15560,11470 15684.65,11470 15750.84,11403.82 16130.53,11403.82 16237.08,11510.36 16337.08,11510.36 16418.36,11591.64 16418.36,12021.64 16355,12085 v1(16355,12105)
  Bottom 6+gnd w5: v1(16355,12105) R150.1@16355,12144.72
I2C1_SDA_6: IC1.140 IC7.5 R14.1 | length 3074
  Top Layer 1 w5: v1(16132.09,9902.2) 16217.82,9926.97 ; v1(16368.85,11260.7) 16369.05,11260.9 16369.05,11311.38 IC1.140@16369.25,11311.57 ; v1(17131.96,9924.67) 17043.26,9932.66 ; v1(17132.48,9815.65) 17132.48,9770.83 IC7.5@17132.09,9770.43 17132.09,9712.62 17146.32,9698.38 R14.1@17147.09,9698.38 ; 16217.82,9926.97 cw(c16222.09,9912.2) 16221.98,9927.58 ; 16217.82,9926.97 cw(c16222.09,9912.2) 16221.98,9927.58 ; 16217.82,9926.97 cw(c16222.09,9912.2) 16221.98,9927.58 ; 16217.82,9926.97 cw(c16222.09,9912.2) 16221.98,9927.58 ; 16217.82,9926.97 cw(c16222.09,9912.2) 16221.98,9927.58 ; 16217.82,9926.97 cw(c16222.09,9912.2) 16221.98,9927.58 ; 16217.82,9926.97 cw(c16222.09,9912.2) 16221.98,9927.58 ; 16217.82,9926.97 cw(c16222.09,9912.2) 16221.98,9927.58 ; 16217.82,9926.97 cw(c16222.09,9912.2) 16221.98,9927.58 ; 16217.82,9926.97 cw(c16222.09,9912.2) 16221.98,9927.58 ; 16217.82,9926.97 cw(c16222.09,9912.2) 16221.98,9927.58 ; 16217.82,9926.97 cw(c16222.09,9912.2) 16221.98,9927.58 ; 16217.82,9926.97 cw(c16222.09,9912.2) 16221.98,9927.58 ; 16217.82,9926.97 cw(c16222.09,9912.2) 16221.98,9927.58 ; 16217.82,9926.97 cw(c16222.09,9912.2) 16221.98,9927.58 ; 16217.82,9926.97 cw(c16222.09,9912.2) 16221.98,9927.58 ; 16221.98,9927.58 17034.05,9933.05 ; 17034.05,9933.05 cw(c17034.69,9837.68) 17043.26,9932.67 ; 17034.05,9933.05 cw(c17034.69,9837.68) 17043.26,9932.67 ; 17034.05,9933.05 cw(c17034.69,9837.68) 17043.26,9932.67 ; 17034.05,9933.05 cw(c17034.69,9837.68) 17043.26,9932.67 ; 17034.05,9933.05 cw(c17034.69,9837.68) 17043.26,9932.67 ; 17034.05,9933.05 cw(c17034.69,9837.68) 17043.26,9932.67 ; 17034.05,9933.05 cw(c17034.69,9837.68) 17043.26,9932.67 ; 17034.05,9933.05 cw(c17034.69,9837.68) 17043.26,9932.67 ; 17034.05,9933.05 cw(c17034.69,9837.68) 17043.26,9932.67 ; 17034.05,9933.05 cw(c17034.69,9837.68) 17043.26,9932.67 ; 17034.05,9933.05 cw(c17034.69,9837.68) 17043.26,9932.67 ; 17034.05,9933.05 cw(c17034.69,9837.68) 17043.26,9932.67 ; 17034.05,9933.05 cw(c17034.69,9837.68) 17043.26,9932.67 ; 17034.05,9933.05 cw(c17034.69,9837.68) 17043.26,9932.67 ; 17034.05,9933.05 cw(c17034.69,9837.68) 17043.26,9932.67 ; 17034.05,9933.05 cw(c17034.69,9837.68) 17043.26,9932.67
  Layer 3 w5: v1(16132.09,9902.2) 16117.8,9916.49 16117.8,10507.91 16180.68,10570.8 16180.68,11175 ; v1(16368.85,11260.7) 16300.27,11264.64 ccw(c16298.24,11229.33) 16275.79,11256.67 16189.81,11186.03 ccw(c16205.68,11166.71) 16188.06,11184.44 16182.13,11178.51 ; v1(17131.96,9924.67) 17132.22,9924.41 17132.22,9815.91 v1(17132.48,9815.65) ; 16180.68,11175 cw(c16185.68,11175) 16182.13,11178.51 ; 16180.68,11175 cw(c16185.68,11175) 16182.13,11178.51 ; 16180.68,11175 cw(c16185.68,11175) 16182.13,11178.51 ; 16180.68,11175 cw(c16185.68,11175) 16182.13,11178.51 ; 16180.68,11175 cw(c16185.68,11175) 16182.13,11178.51 ; 16180.68,11175 cw(c16185.68,11175) 16182.13,11178.51 ; 16180.68,11175 cw(c16185.68,11175) 16182.13,11178.51 ; 16180.68,11175 cw(c16185.68,11175) 16182.13,11178.51 ; 16180.68,11175 cw(c16185.68,11175) 16182.13,11178.51 ; 16180.68,11175 cw(c16185.68,11175) 16182.13,11178.51 ; 16180.68,11175 cw(c16185.68,11175) 16182.13,11178.51 ; 16180.68,11175 cw(c16185.68,11175) 16182.13,11178.51 ; 16180.68,11175 cw(c16185.68,11175) 16182.13,11178.51 ; 16180.68,11175 cw(c16185.68,11175) 16182.13,11178.51 ; 16180.68,11175 cw(c16185.68,11175) 16182.13,11178.51 ; 16180.68,11175 cw(c16185.68,11175) 16182.13,11178.51
I2C2_SCL: IC1.69 J7.2 | length 2984.4
  Top Layer 1 w5: v1(16895,10528.82) 16920.43,10503.38 IC1.69@16920.43,10466.06
  Top Layer 1 w10: J7.2@16294.88,8662.6 v1@16294.88,8694.34
  Unused w5: v1(16294.65,8694.57) 16237.44,8709.56 ccw(c16233.55,8694.69) 16224.96,8707.44 16187,8681.93 cw(c16178.43,8694.69) 16168.36,8706.3 16224.82,8755.31 ccw(c16215,8766.65) 16225.61,8756.04 16228.54,8758.97 ccw(c16225,8762.5) 16230,8762.5 16230,9292.25 15960,9562.25 15960,10192.53 16061.29,10293.82 16112.03,10293.82 16259.14,10440.93 16259.36,10440.93 16295.6,10477.17 16868.86,10477.17 16895,10503.31 v1(16895,10528.82)
I2C2_SDA: IC1.70 J9.2 | length 2998.9
  Top Layer 1 w5: v1(16905,10553.82) 16907.04,10553.82 16940.12,10520.74 IC1.70@16940.12,10466.06
  Top Layer 1 w10: J9.2@16233.78,8662.72 v1@16233.78,8694.46
  Unused w5: v1(16233.55,8694.69) 16190.11,8672.16 cw(c16178.43,8694.69) 16161.8,8713.85 16218.28,8762.87 ccw(c16215,8766.65) 16220,8766.65 16220,9288.11 15950,9558.11 15950,10196.67 16057.14,10303.82 16107.89,10303.82 16255,10450.93 16255.21,10450.93 16291.46,10487.17 16860.9,10487.17 16879.63,10505.9 16879.63,10535.19 16888.63,10544.19 16895.37,10544.19 v1(16905,10553.82)
I2S3_CK: IC2.111 R155.1 | length 1285.2
  Top Layer 1 w5: IC2.111@15631.88,11307.38 15631.88,11435.49 v1(15633.25,11436.87)
  Layer 3 w5: v1(15633.25,11436.87) 15664.44,11468.06 15670.13,11468.06 15699.83,11497.75 15699.83,12040.21 15776.16,12116.54 16063.46,12116.54 16086.6,12093.4 16124.55,12093.4 v1(16139.66,12108.51)
  Bottom 6+gnd w5: v1@16140,12111.13 R155.1@16140,12144.72
I2S3_MCK: IC2.97 R156.1 | length 1529.4
  Top Layer 1 w5: IC2.97@15749.52,11012.58 15750.22,11011.88 15783.12,11011.88 15799.13,10995.87 15799.13,10981.66 v1(15798.98,10981.51)
  Layer 2 w5: v1(15930,12009.63) 16074.63,12009.63 16095.76,12030.76 v1(16095.76,12110.37)
  Layer 3 w5: v1(15798.98,10981.51) 15864.25,10981.51 cw(c15864.25,10976.51) 15866.91,10980.74 ccw(c15875,10993.82) 15883.12,10980.76 cw(c15885.75,10976.51) 15885.75,10981.51 15931.51,10981.51 15940,10990 15940,12000 15930.37,12009.63 v1(15930,12009.63)
  Bottom 6+gnd w5: R156.1@16095,12144.72 16095,12111.13 v1(16095.76,12110.37)
I2S3_SDI: IC2.112 R152.1 | length 1486.9
  Top Layer 1 w5: IC2.112@15612.19,11307.38 15612.19,11407.01 15614.46,11409.27 v1(15614.46,11412.18)
  Layer 3 w5: v1(15614.46,11412.18) 15614.46,11409.27 15618.24,11405.5 15618.24,11379.67 15621.16,11376.74 15641.74,11376.74 15650,11385 15650,11390.3 15730,11470.3 15730,12027.95 15788.58,12086.54 16050.18,12086.54 16076.72,12060 16145.52,12060 16158.65,12073.13 16184.02,12073.13 16205.51,12094.63 16236.37,12094.63 16251.74,12110 v1(16275,12110)
  Bottom 6+gnd w5: v1@16275,12109.16 R152.1@16275,12142.76
I2S3_SDO: IC2.113 R153.1 | length 1447.1
  Top Layer 1 w5: IC2.113@15592.51,11307.38 15592.51,11426.99 15595.11,11429.6 v1(15595.11,11432.51)
  Layer 3 w5: v1(15595.11,11432.51) 15615.88,11432.51 15643.76,11404.62 15650.18,11404.62 15720,11474.44 15720,12032.09 15777.91,12090 15784.44,12096.54 16054.32,12096.54 16060.86,12090 16080.86,12070 16141.38,12070 16154.51,12083.13 16179.88,12083.13 16206.74,12110 v1(16230,12110)
  Bottom 6+gnd w5: v1@16230,12109.16 R153.1@16230,12142.76
I2S3_WS: IC2.110 R154.1 | length 1314.9
  Top Layer 1 w5: IC2.110@15651.56,11307.38 15651.56,11425.01 15665.37,11438.82 v1(15665.37,11441.56)
  Layer 3 w5: v1(15665.37,11441.56) 15709.83,11486.01 15709.83,12036.07 15780.3,12106.54 16058.46,12106.54 16084.32,12080.68 16135.68,12080.68 16146.03,12091.03 16146.03,12093.13 16162.89,12110 v1(16185,12110)
  Bottom 6+gnd w5: v1@16185,12111.13 R154.1@16185,12144.72
I2S_CKIN: IC2.99 R148.1 | length 3903.4
  Top Layer 1 w5: v1(15692.95,11053.05) 15694.05,11051.95 IC2.99@15749.52,11051.95
  Unused w5: v1(15692.95,11053.05) 15655,11015.1 15655,10708.82 15570,10623.82 15075,10623.82 15060,10638.82 15060,11258.07 15176.5,11374.57 15226.1,11374.57 15234.03,11366.64 15242.32,11366.64 15242.87,11367.19 15305.47,11367.19 15363.28,11425 15505,11425 15566.18,11363.82 16147.1,11363.82 16253.28,11470 16353.28,11470 16515,11631.72 16515,12051.74 16491.37,12075.37 16476.74,12075.37 16470.13,12081.99 16451.84,12081.99 16447.03,12086.8 v1(16444.12,12086.8)
  Bottom 6+gnd w5: v1(16444.12,12086.8) 16444.12,12143.85 R148.1@16445,12144.72
LATCH: IC14.18 IC15.1 IC16.1 IC17.1 | length 3329.6
  Top Layer 1 w8: 18852.99,9736.81 18852.99,10161.81 19045,10353.82 19045,10683.82 19143.98,10782.79 IC14.18@19195.67,10782.79 19393.98,10782.79 19480,10868.82 19935,10868.82 20080,11013.82 v1(20300,11013.82) IC15.1@20300,10959.25 ; IC17.1@20300,10211.53 v1(20300,10266.1) ; IC16.1@20300,10591.53 v1(20300,10646.1)
  Layer 3 w8: v1(20300,10266.1) v1(20300,11013.82)
LCD_RESET: H3.41 IC1.96 R46.1 | length 5534.4
  Top Layer 1 w5: v1(16046.71,10112.2) 16213.01,10048.51 ccw(c16222.09,10072.2) 16222.09,10046.83 16887.09,10046.83 ccw(c16887.09,10072.2) 16888.37,10046.86 17039.56,10054.68 ccw(c17038.25,10080.02) 17050.71,10057.92 17072.47,10070.19 v1(17085.83,10082.13) ; v1(16910,11018.82) 16931.73,10997.09 IC1.96@17057.76,10997.09 ; v1(18025.42,11286.98) 18060.42,11251.98 R46.1@18105.42,11251.98
  Unused w5: v1(17110.25,10223.87) 17842.12,10461.81 cw(c17906.89,10262.58) 17842.27,10461.86 18056.6,10531.36 ccw(c18051.86,10545.99) 18064.67,10554.49 18025.61,10613.35 ccw(c18021.44,10610.58) 18025,10614.09 18016.49,10622.6 18016.49,10625.57 ccw(c18011.49,10625.57) 18015.66,10628.34 18007.76,10640.24 cw(c18020.57,10648.74) 18005.2,10649.23 v1(18025.42,11286.98)
  Layer 3 w5: v1(16046.71,10112.2) 16047.09,10112.58 16047.09,10481.35 16031.67,10496.76 16031.67,10521.79 16087.09,10577.2 16087.09,10995.18 16086.16,10996.1 16086.16,10996.39 16086.16,10997.98 16085.24,10999.28 16074.18,11014.87 cw(c16086.71,11023.77) 16071.34,11023.77 16071.34,11052.2 cw(c16086.71,11052.2) 16072.14,11057.11 16149.06,11286.6 cw(c16192.09,11272.2) 16159.94,11304.22 16163.81,11308.1 cw(c16188.49,11283.28) 16188.49,11318.28 16765.15,11318.28 16904.59,11178.84 16904.59,11041.1 16910,11035.69 v1(16910,11018.82) ; v1(17085.83,10082.13) 17110,10106.29 17110,10223.62 v1(17110.25,10223.87)
  Bottom 6+gnd w5: H3.41@17950,11258.46 17998.68,11261.87 18005.13,11265.87 ccw(c18001.18,11272.25) 18006.63,11267.1 v1(18025.42,11286.98)
LCD_TE: IC1.48 R137.2 | length 2186.7
  Top Layer 1 w5: v1(16495,10343.82) 16507.05,10355.87 IC1.48@16507.05,10466.06
  Unused w5: v1(16495,10343.82) 16496.14,10317.95 16480.47,10302.28 16480.47,10293.98 16480.47,10285.69 16486.34,10279.82 16523.4,10242.76 16524.24,10241.92 16525.35,10241.55 16679.16,10190.28 ; 16679.18,10190.27 ccw(c16680.74,10195.02) 16680.87,10190.02 17015.31,10199.58 ccw(c17014.99,10210.64) 17022.78,10202.78 17060,10240 v1(17750,10470)
  Bottom 6+gnd w5: v1(17750,10470) 17750,10350 17800,10300 17990,10300 18145.28,10455.28 R137.2@18145.28,10500
LDQM1_7: IC2.141 R9.2 U3.15 U4.15 | length 2842.9
  Top Layer 1 w5: IC2.141@15041.33,11307.38 15041.53,11307.12 15041.53,11254.74 v1(15041.74,11254.54) ; R9.2@15220.52,9660.61 15220.52,9662.58 15250.46,9692.53 15267.19,9692.53 v1(15284.96,9710.3) ; v1@15285.2,10170.19 U3.15@15285.2,10232.03
  Layer 3 w5: v1(15041.74,11254.54) 15041.61,11254.54 14896.71,11109.64 14896.7,11090.81 14896.67,10533.22 cw(c14891.67,10533.25) 14895.48,10530 14853.45,10480.75 ccw(c14895.27,10445.04) 14841.57,10456.9 14841.07,10454.64 ccw(c14875.25,10447.09) 14840.25,10447.14 14840.25,10444.91 14841.75,9709.3 14841.75,9709.17 ccw(c14907.12,9709.43) 14906.89,9644.05 14938.35,9643.94 ccw(c14938.46,9673.94) 14938.46,9643.94 15064.63,9643.94 15127.66,9644.1 ccw(c15127.48,9709.47) 15147.94,9647.38 15176.29,9656.72 ccw(c15158.97,9709.31) 15177.42,9657.1 15237.44,9678.3 ccw(c15232.45,9692.45) 15240.62,9679.87 15282.68,9707.19 ccw(c15279.96,9711.38) 15284.51,9709.31 v1(15284.96,9710.3) v1(15284.96,10169.94)
  Bottom 6+gnd w5: v1@15285.2,9709.56 U4.15@15285.2,9771.4